# EAGLE board urdevboard (EAGLE 5.06), part 1 of 2
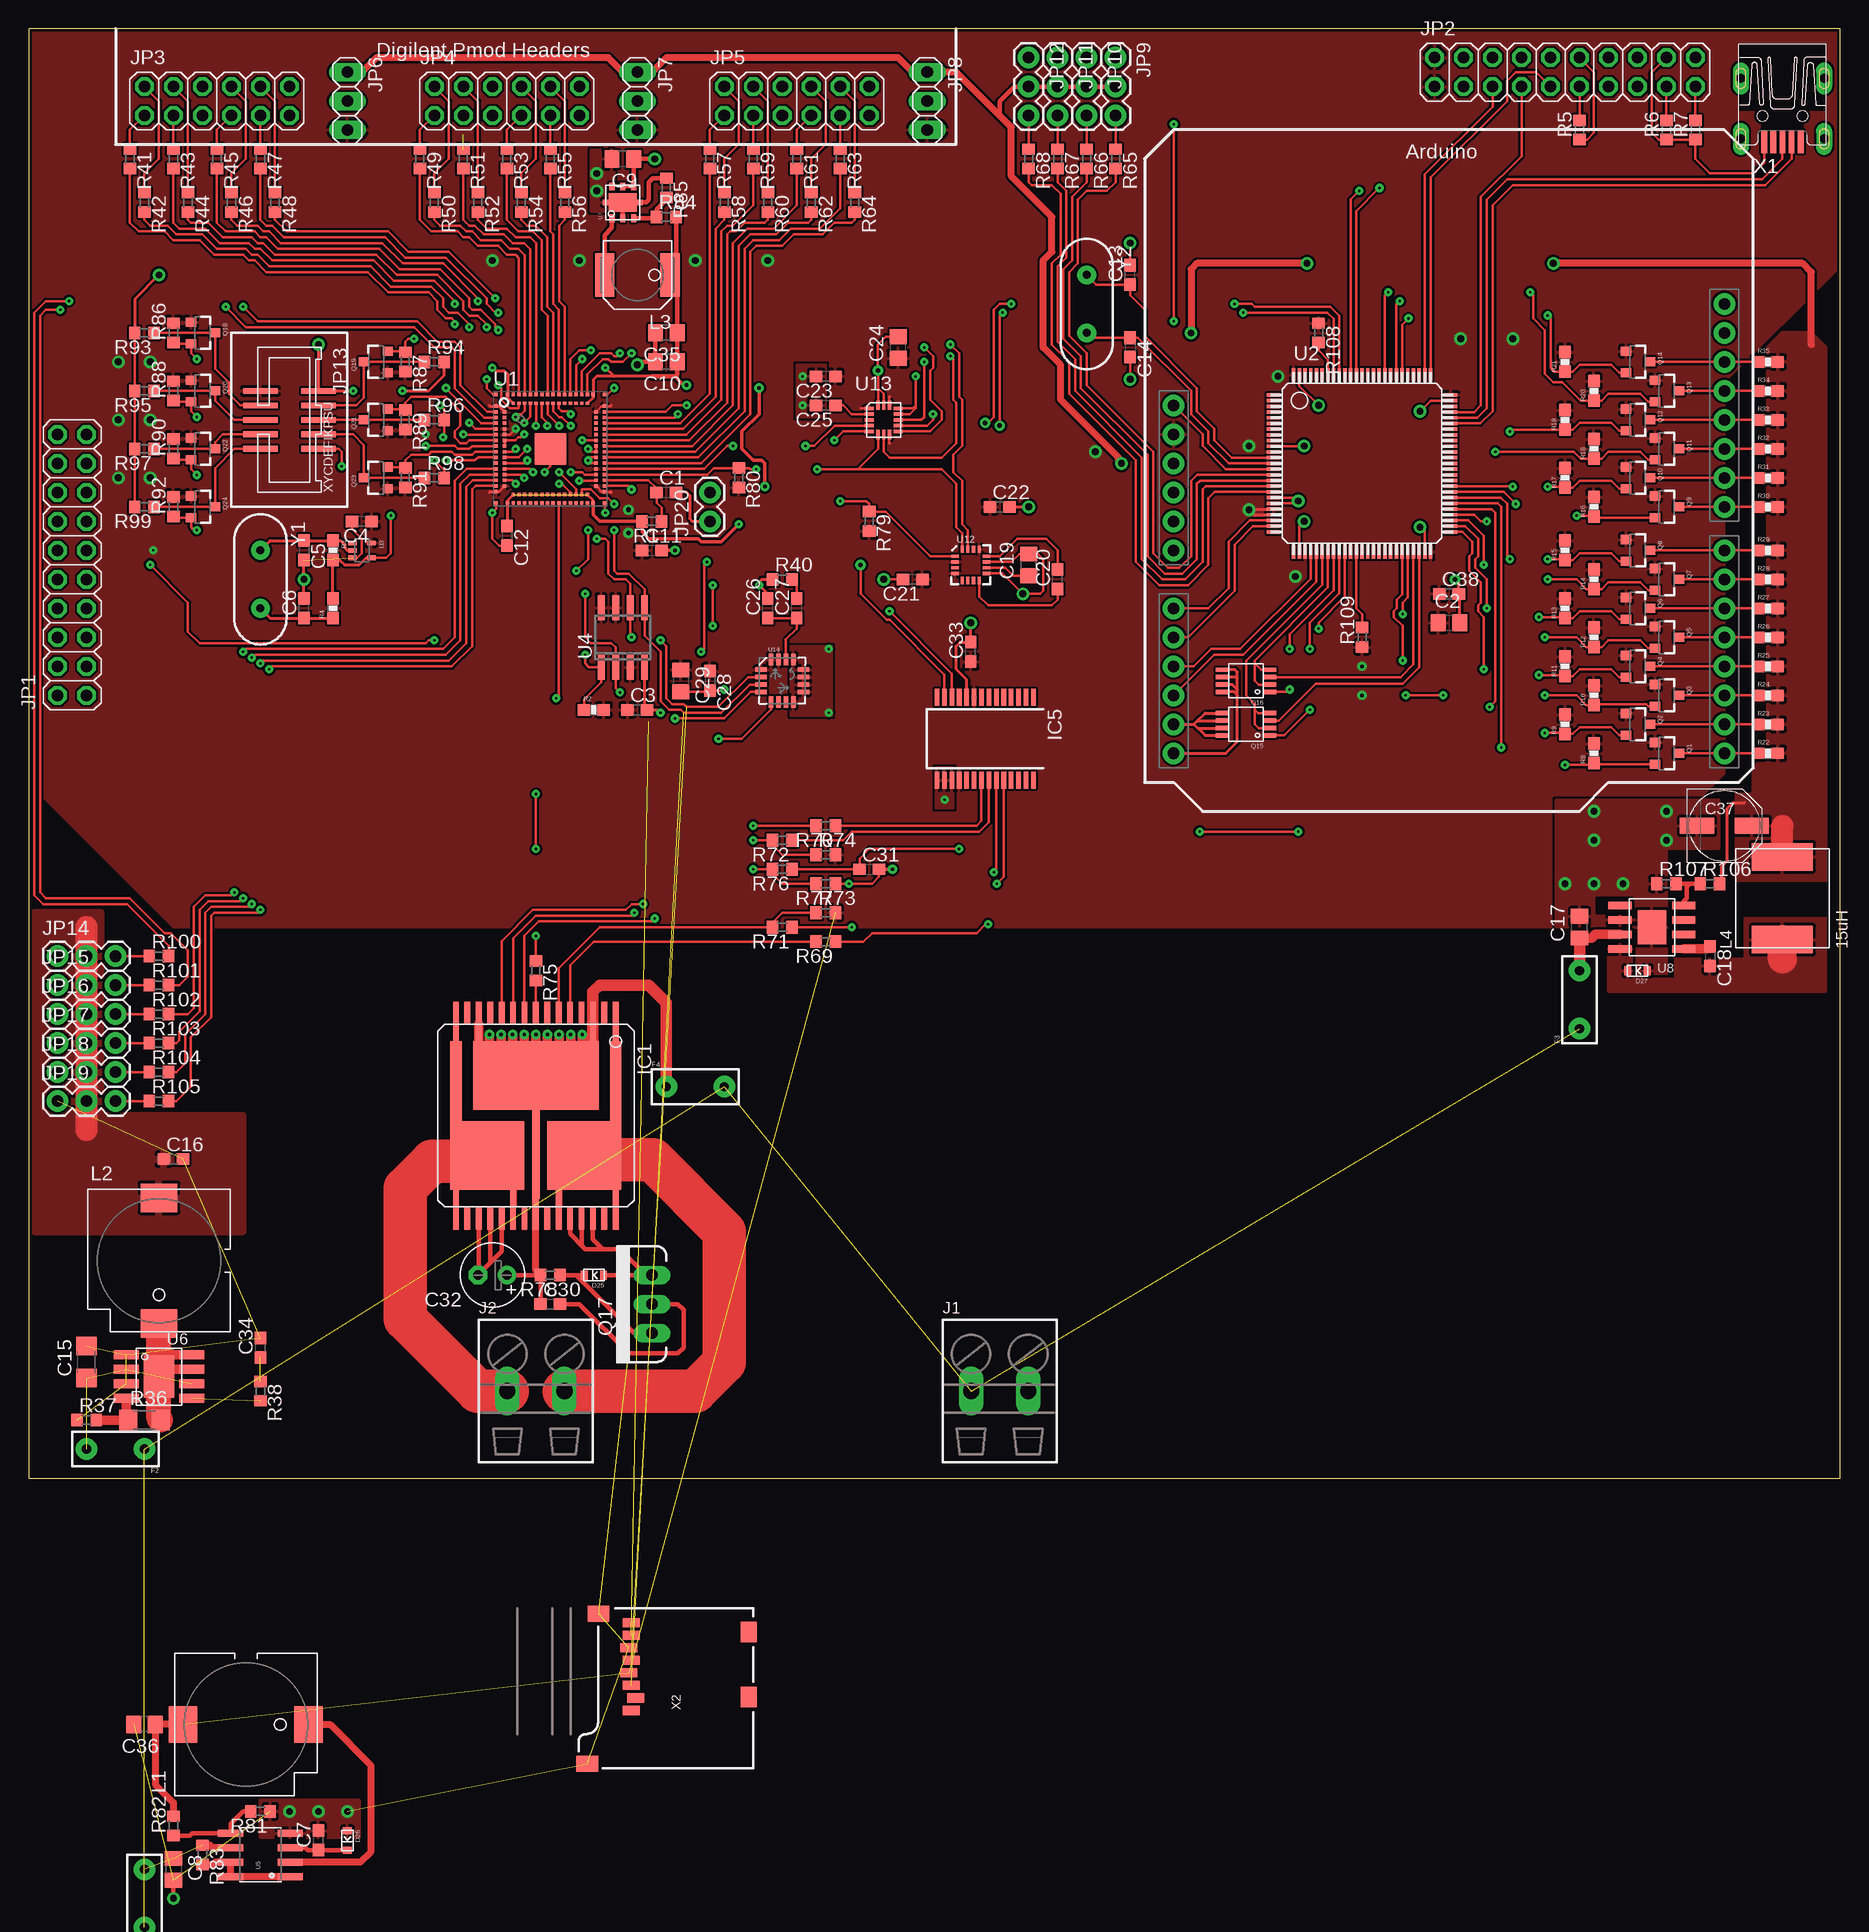
[diagram p0: board, top side]
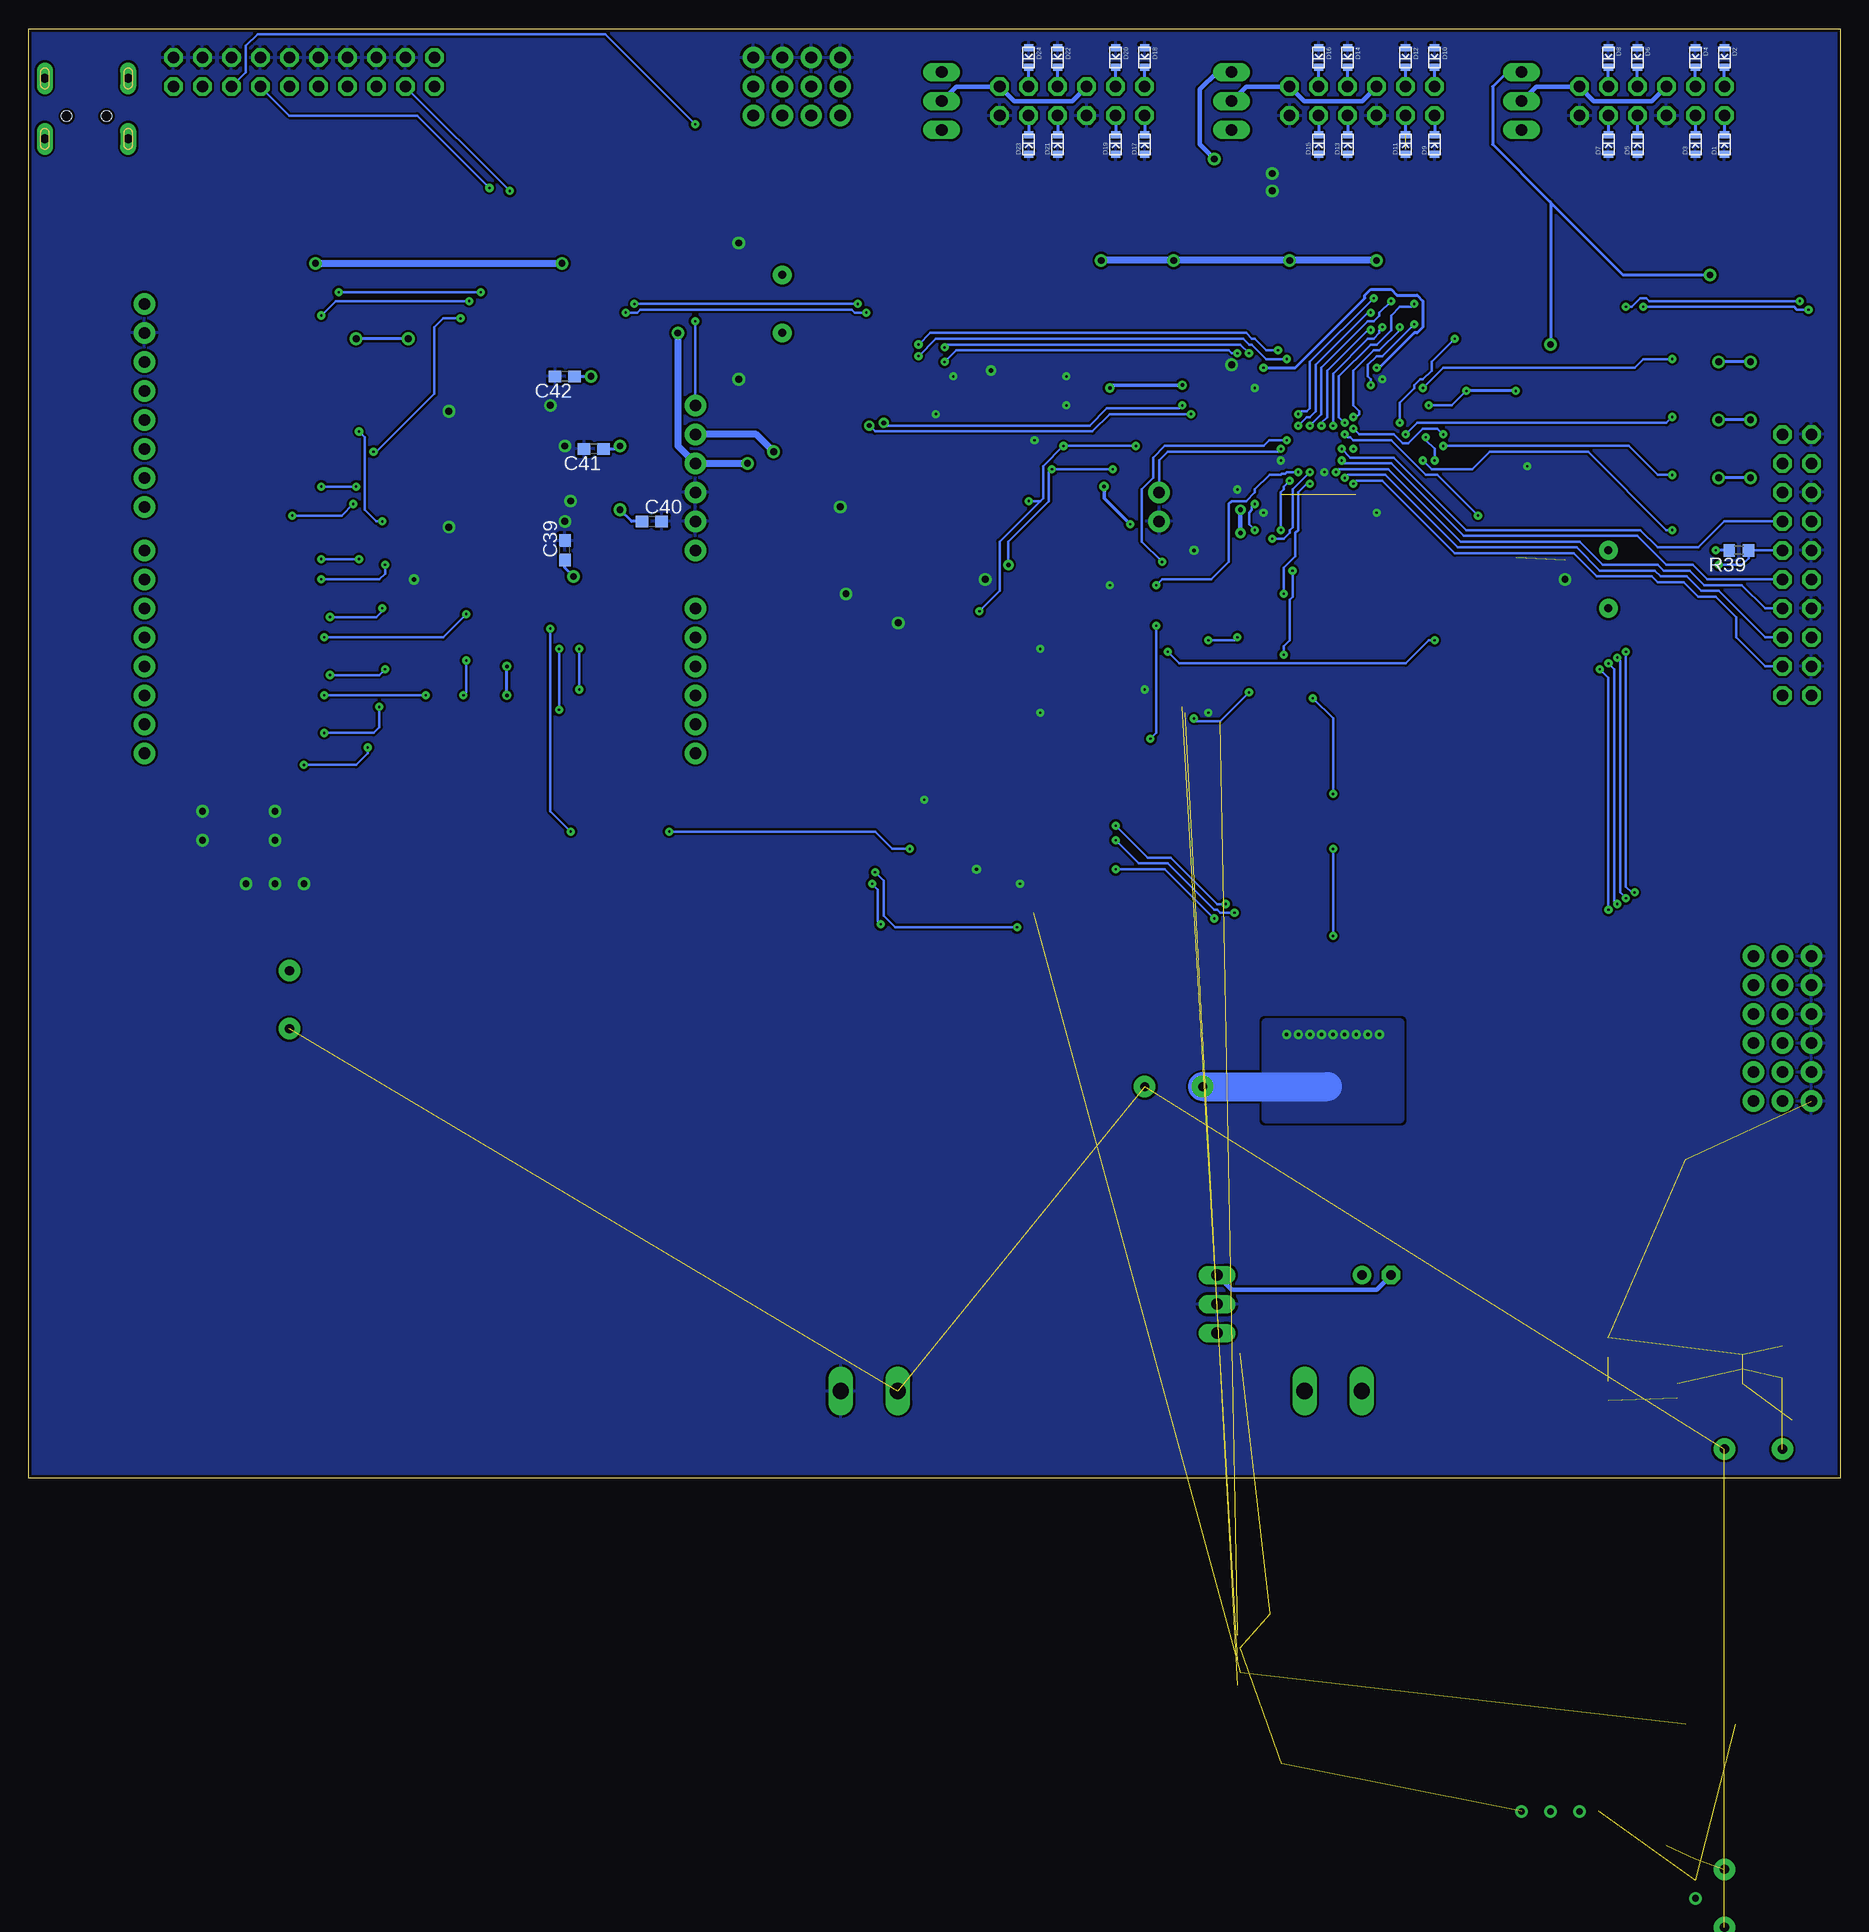
[diagram p1: board, bottom side, seen from below]

Size 158.75 x 127 mm. Coordinates in mm from the lower left corner, seen from the top.
Outline: 0,0 158.73,0 158.75,127 0,127 0,0
Copper layers (1*16): Top 0.035mm / dielectric 1.5mm / Bottom 0.035mm
Design rules "unified *": minimum track width 7mil, minimum drill 6mil, track to track 8mil, track to pad 7mil, pad to pad 7mil, via to via 8mil, smd to smd 7mil, copper to edge 10mil, drill to drill 8mil, minimum pad ring 12mil, minimum via ring 10mil, stop-mask expansion 4mil, vias tented up to drill 25mil, thermal gap 10mil

## Footprints (pad centres in the part's own frame; a part is rotated, then mirrored left to right if it is on the bottom)
C0603 = smd 1.1 x 1: 1 -0.85,0; 2 0.85,0
C0805 = smd 1.3 x 1.5: 1 -0.95,0; 2 0.95,0
C1206 = smd 1.6 x 1.8: 1 -1.4,0; 2 1.4,0
E2,5-6 = drill 0.813 pad 1.6 round: + -1.27,0 | drill 0.813 pad 1.6 octagon: - 1.27,0
PANASONIC_D = smd 3 x 1.4: + 2.4,0; - -2.4,0
D0603 = smd 0.8 x 0.6: A 0,-0.85; C 0,0.85
PTC = drill 0.8 pad 1.88 round: P$1 -2.54,0; P$2 2.54,0
MULTIPOWERSO-30 = smd 0.508 x 12: 1 -7,-4; 15 7,-4; 16 7,4; 30 -7,4 | smd 0.508 x 2: 2 -6,-9; 4 -4,-9; 5 -3,-9; 6 -2,-9; 7 -1,-9; 8 0,-9; 9 1,-9; 10 2,-9; 11 3,-9; 12 4,-9; 14 6,-9; 17 6,9; 18 5,9; 19 4,9; 20 3,9; 22 1,9; 24 -1,9; 26 -3,9; 27 -4,9; 28 -5,9; 29 -6,9 | smd 0.508 x 4: 3 -5,-8; 13 5,-8; 21 2,8; 23 0,8; 25 -2,8 | smd 6.5 x 6: OUTA -4.25,3.5; OUTB 4.25,3.5 | smd 1 x 7.5: OUTA@1 -7,-2.755; OUTB@1 7,-2.755 | smd 11 x 6: VCC 0,-3.5 | smd 0.65 x 8.3: VCC@1 0,3.145
SSOP28 = smd 0.4 x 1.5: 1 -4.225,-3.625; 2 -3.575,-3.625; 3 -2.925,-3.625; 4 -2.275,-3.625; 5 -1.625,-3.625; 6 -0.975,-3.625; 7 -0.325,-3.625; 8 0.325,-3.625; 9 0.975,-3.625; 10 1.625,-3.625; 11 2.275,-3.625; 12 2.925,-3.625; 13 3.575,-3.625; 14 4.225,-3.625; 15 4.225,3.625; 16 3.575,3.625; 17 2.925,3.625; 18 2.275,3.625; 19 1.625,3.625; 20 0.975,3.625; 21 0.325,3.625; 22 -0.325,3.625; 23 -0.975,3.625; 24 -1.625,3.625; 25 -2.275,3.625; 26 -2.925,3.625; 27 -3.575,3.625; 28 -4.225,3.625
796689-2 = drill 1.422 long: 1 -2.5,0; 2 2.5,0
DUEMILANOVE_VIAS = drill 1.016 pad 1.88 round: 3.3V 50.8,13.97; 5V 50.8,16.51; A0 50.8,29.21; A1 50.8,31.75; A2 50.8,34.29; A3 50.8,36.83; A4 50.8,39.37; A5 50.8,41.91; AREF 2.54,2.54; D2 2.54,36.83; D3 2.54,34.29; D4 2.54,31.75; D5 2.54,29.21; D6 2.54,26.67; D7 2.54,24.13; D8 2.54,20.32; D9 2.54,17.78; D10 2.54,15.24; D11 2.54,12.7; D12 2.54,10.16; D13 2.54,7.62; GND@0 50.8,19.05; GND@1 50.8,21.59; GND@2 2.54,5.08; RES 50.8,11.43; RX 2.54,41.91; TX 2.54,39.37; VIN 50.8,24.13
2X10 = drill 1.016 octagon: 1 -11.43,-1.27; 2 -11.43,1.27; 3 -8.89,-1.27; 4 -8.89,1.27; 5 -6.35,-1.27; 6 -6.35,1.27; 7 -3.81,-1.27; 8 -3.81,1.27; 9 -1.27,-1.27; 10 -1.27,1.27; 11 1.27,-1.27; 12 1.27,1.27; 13 3.81,-1.27; 14 3.81,1.27; 15 6.35,-1.27; 16 6.35,1.27; 17 8.89,-1.27; 18 8.89,1.27; 19 11.43,-1.27; 20 11.43,1.27
2X06 = drill 1.016 octagon: 1 -6.35,-1.27; 2 -6.35,1.27; 3 -3.81,-1.27; 4 -3.81,1.27; 5 -1.27,-1.27; 6 -1.27,1.27; 7 1.27,-1.27; 8 1.27,1.27; 9 3.81,-1.27; 10 3.81,1.27; 11 6.35,-1.27; 12 6.35,1.27
1X03 = drill 1.016 long: 1 -2.54,0; 2 0,0; 3 2.54,0
1X03' = drill 1.016 pad 1.88 round: 1 0,0; 2 2.54,0; 3 5.08,0
SHF-105-01-L-D-SM = smd 0.508 x 3.048: 1 -2.54,-2.54; 2 -2.54,2.54; 3 -1.27,-2.54; 4 -1.27,2.54; 5 0,-2.54; 6 0,2.54; 7 1.27,-2.54; 8 1.27,2.54; 9 2.54,-2.54; 10 2.54,2.54
1X02 = drill 1.016 pad 1.88 round: 1 0,0; 2 2.54,0
SLF12565 = smd 3.2 x 2.5: 1 0,-5.5; 2 0,5.5
PANASONIC_ELL6 = smd 1.7 x 3.8: 1 -2.85,0; 2 2.85,0
IHLP-3232DZ = smd 2.413 x 5.334: 1 -3.619,0; 2 3.619,0
SOT23-3 = smd 0.8 x 0.9: 1 -0.95,-1; 2 0.95,-1; 3 0,1.1
MICRO8 = smd 0.38 x 1.04: 1 -0.975,-2.12; 2 -0.325,-2.12; 3 0.325,-2.12; 4 0.975,-2.12; 5 0.975,2.12; 6 0.325,2.12; 7 -0.325,2.12; 8 -0.975,2.12
TO220V = drill 1.016 long: 1 -2.54,0; 2 0,0; 3 2.54,0
R0603 = smd 1 x 1.1: 1 -0.85,0; 2 0.85,0
0603-RES = smd 1.1 x 1: 1 -0.85,0; 2 0.85,0
R1206 = smd 1.6 x 1.803: 1 -1.422,0; 2 1.422,0
124QFN = smd 0.3 x 0.3: A1 -4.75,4.75; A2 -4.75,3.75; A3 -4.75,3.25; A4 -4.75,2.75; A5 -4.75,2.25; A6 -4.75,1.75; A7 -4.75,1.25; A8 -4.75,0.75; A9 -4.75,0.25; A10 -4.75,-0.25; A11 -4.75,-0.75; A12 -4.75,-1.25; A13 -4.75,-1.75; A14 -4.75,-2.25; A15 -4.75,-2.75; A16 -4.75,-3.25; A17 -4.75,-3.75; A18 -4.75,-4.75; A19 -3.75,-4.75; A20 -3.25,-4.75; A21 -2.75,-4.75; A22 -2.25,-4.75; A23 -1.75,-4.75; A24 -1.25,-4.75; A25 -0.75,-4.75; A26 -0.25,-4.75; A27 0.25,-4.75; A28 0.75,-4.75; A29 1.25,-4.75; A30 1.75,-4.75; A31 2.25,-4.75; A32 2.75,-4.75; A33 3.25,-4.75; A34 3.75,-4.75; A35 4.75,-4.75; A36 4.75,-3.75; A37 4.75,-3.25; A38 4.75,-2.75; A39 4.75,-2.25; A40 4.75,-1.75; A41 4.75,-1.25; A42 4.75,-0.75; A43 4.75,-0.25; A44 4.75,0.25; A45 4.75,0.75; A46 4.75,1.25; A47 4.75,1.75; A48 4.75,2.25; A49 4.75,2.75; A50 4.75,3.25; A51 4.75,3.75; A52 4.75,4.75; A53 3.75,4.75; A54 3.25,4.75; A55 2.75,4.75; A56 2.25,4.75; A57 1.75,4.75; A58 1.25,4.75; A59 0.75,4.75; A60 0.25,4.75; A61 -0.25,4.75; A62 -0.75,4.75; A63 -1.25,4.75; A64 -1.75,4.75; A65 -2.25,4.75; A66 -2.75,4.75; A67 -3.25,4.75; A68 -3.75,4.75; B1 -4,3.25; B2 -4,2.75; B3 -4,2.25; B4 -4,1.75; B5 -4,1.25; B6 -4,0.75; B7 -4,0.25; B8 -4,-0.25; B9 -4,-0.75; B10 -4,-1.25; B11 -4,-1.75; B12 -4,-2.25; B13 -4,-2.75; B14 -4,-3.25; B15 -3.25,-4; B16 -2.75,-4; B17 -2.25,-4; B18 -1.75,-4; B19 -1.25,-4; B20 -0.75,-4; B21 -0.25,-4; B22 0.25,-4; B23 0.75,-4; B24 1.25,-4; B25 1.75,-4; B26 2.25,-4; B27 2.75,-4; B28 3.25,-4; B29 4,-3.25; B30 4,-2.75; B31 4,-2.25; B32 4,-1.75; B33 4,-1.25; B34 4,-0.75; B35 4,-0.25; B36 4,0.25; B37 4,0.75; B38 4,1.25; B39 4,1.75; B40 4,2.25; B41 4,2.75; B42 4,3.25; B43 3.25,4; B44 2.75,4; B45 2.25,4; B46 1.75,4; B47 1.25,4; B48 0.75,4; B49 0.25,4; B50 -0.25,4; B51 -0.75,4; B52 -1.25,4; B53 -1.75,4; B54 -2.25,4; B55 -2.75,4; B56 -3.25,4 | smd 2.8 x 2.8: PAD 0,0
LQFP100 = smd 1.2 x 0.3: 1 -7.75,6; 2 -7.75,5.5; 3 -7.75,5; 4 -7.75,4.5; 5 -7.75,4; 6 -7.75,3.5; 7 -7.75,3; 8 -7.75,2.5; 9 -7.75,2; 10 -7.75,1.5; 11 -7.75,1; 12 -7.75,0.5; 13 -7.75,0; 14 -7.75,-0.5; 15 -7.75,-1; 16 -7.75,-1.5; 17 -7.75,-2; 18 -7.75,-2.5; 19 -7.75,-3; 20 -7.75,-3.5; 21 -7.75,-4; 22 -7.75,-4.5; 23 -7.75,-5; 24 -7.75,-5.5; 25 -7.75,-6; 51 7.75,-6; 52 7.75,-5.5; 53 7.75,-5; 54 7.75,-4.5; 55 7.75,-4; 56 7.75,-3.5; 57 7.75,-3; 58 7.75,-2.5; 59 7.75,-2; 60 7.75,-1.5; 61 7.75,-1; 62 7.75,-0.5; 63 7.75,0; 64 7.75,0.5; 65 7.75,1; 66 7.75,1.5; 67 7.75,2; 68 7.75,2.5; 69 7.75,3; 70 7.75,3.5; 71 7.75,4; 72 7.75,4.5; 73 7.75,5; 74 7.75,5.5; 75 7.75,6 | smd 0.3 x 1.2: 26 -6,-7.75; 27 -5.5,-7.75; 28 -5,-7.75; 29 -4.5,-7.75; 30 -4,-7.75; 31 -3.5,-7.75; 32 -3,-7.75; 33 -2.5,-7.75; 34 -2,-7.75; 35 -1.5,-7.75; 36 -1,-7.75; 37 -0.5,-7.75; 38 0,-7.75; 39 0.5,-7.75; 40 1,-7.75; 41 1.5,-7.75; 42 2,-7.75; 43 2.5,-7.75; 44 3,-7.75; 45 3.5,-7.75; 46 4,-7.75; 47 4.5,-7.75; 48 5,-7.75; 49 5.5,-7.75; 50 6,-7.75; 76 6,7.75; 77 5.5,7.75; 78 5,7.75; 79 4.5,7.75; 80 4,7.75; 81 3.5,7.75; 82 3,7.75; 83 2.5,7.75; 84 2,7.75; 85 1.5,7.75; 86 1,7.75; 87 0.5,7.75; 88 0,7.75; 89 -0.5,7.75; 90 -1,7.75; 91 -1.5,7.75; 92 -2,7.75; 93 -2.5,7.75; 94 -3,7.75; 95 -3.5,7.75; 96 -4,7.75; 97 -4.5,7.75; 98 -5,7.75; 99 -5.5,7.75; 100 -6,7.75
SC70 = smd 0.4 x 0.75: 1 -0.65,-0.825; 2 0,-0.825; 3 0.65,-0.825; 4 0.65,0.825; 5 -0.65,0.825
SO-08 = smd 0.6 x 2.2: 1 -1.905,-2.6; 2 -0.635,-2.6; 3 0.635,-2.6; 4 1.905,-2.6; 5 1.905,2.6; 6 0.635,2.6; 7 -0.635,2.6; 8 -1.905,2.6
SO08 = smd 0.61 x 2.21: 1 -1.905,-2.616; 2 -0.635,-2.616; 3 0.635,-2.616; 4 1.905,-2.616; 5 1.905,2.616; 6 0.635,2.616; 7 -0.635,2.616; 8 -1.905,2.616
SO8_EP1 = smd 2.2 x 0.8: 1 -2.87,1.905; 2 -2.87,0.635; 3 -2.87,-0.635; 4 -2.87,-1.905; 5 2.87,-1.905; 6 2.87,-0.635; 7 2.87,0.635; 8 2.87,1.905 | smd 2.71 x 3.7: PAD 0,0
MLP6 = smd 0.7 x 0.45: 1 -1.4,0.95; 2 -1.4,0; 3 -1.4,-0.95; 4 1.4,-0.95; 5 1.4,0; 6 1.4,0.95 | smd 0.45 x 0.525: PADA 0,1.475; PADC 0,-1.475 | smd 1.65 x 2.45: PADB 0,0
R-PDSO-G08 = smd 2.032 x 0.66: 1 -2.794,1.905; 2 -2.794,0.635; 3 -2.794,-0.635; 4 -2.794,-1.905; 5 2.794,-1.905; 6 2.794,-0.635; 7 2.794,0.635; 8 2.794,1.905 | smd 2.489 x 2.997: PAD 0,0
16LPCC = smd 0.65 x 0.28: 1 -1.37,0.75; 2 -1.37,0.25; 3 -1.37,-0.25; 4 -1.37,-0.75; 9 1.37,-0.75; 10 1.37,-0.25; 11 1.37,0.25; 12 1.37,0.75 | smd 0.28 x 0.65: 5 -0.75,-1.37; 6 -0.25,-1.37; 7 0.25,-1.37; 8 0.75,-1.37; 13 0.75,1.37; 14 0.25,1.37; 15 -0.25,1.37; 16 -0.75,1.37
VQFN-16 = smd 0.8 x 0.3: 1 -1.275,1; 2 -1.275,0.5; 3 -1.275,0; 4 -1.275,-0.5; 5 -1.275,-1; 9 1.275,-1; 10 1.275,-0.5; 11 1.275,0; 12 1.275,0.5; 13 1.275,1 | smd 0.3 x 0.8: 6 -0.5,-1.275; 7 0,-1.275; 8 0.5,-1.275; 14 0.5,1.275; 15 0,1.275; 16 -0.5,1.275
LGA16-4X4 = smd 1 x 0.4: 1 -1.85,0.975; 2 -1.85,0.325; 3 -1.85,-0.325; 4 -1.85,-0.975; 9 1.85,-0.975; 10 1.85,-0.325; 11 1.85,0.325; 12 1.85,0.975 | smd 0.4 x 1: 5 -0.975,-1.85; 6 -0.325,-1.85; 7 0.325,-1.85; 8 0.975,-1.85; 13 0.975,1.85; 14 0.325,1.85; 15 -0.325,1.85; 16 -0.975,1.85
UX60-MB-5S8 = smd 2 x 0.5: 1 8.65,1.6; 2 8.65,0.8; 3 8.65,0; 4 8.65,-0.8; 5 8.65,-1.6 | drill 0.8 long: M1 3.1,-3.65; M2 3.1,3.65; M3 8.4,3.65; M4 8.4,-3.65 | hole 0.9: 6.4,-1.75; 6.4,1.75
MICRO-SD-SOCKET-PP = smd 0.8 x 1.5: 1 -8.94,10.7; 2 -7.84,10.3; 3 -6.74,10.7; 4 -5.64,10.9; 5 -4.54,10.7; 6 -3.44,10.9; 7 -2.34,10.7; 8 -1.24,10.7 | smd 1.8 x 1.4: CD1 -2.05,0.4; CD2 -7.75,0.4 | smd 1.4 x 1.9: GND1 -13.6,14.55; GND3 -0.45,13.55
HC49US = drill 0.7 pad 1.651 round: 1 -2.54,0; 2 2.54,0

## Placement (x,y rotation side)
C1  1uF  [C0603]  55.88,86.36 0 top
C2  10uF  [C0805]  124.46,74.93 0 top
C3  0.1uF  [C0603]  53.34,67.31 0 top
C4  0.1uF  [C0603]  29.21,83.82 180 top
C5  18pF  [C0603]  24.13,81.28 270 top
C6  18pF  [C0603]  24.13,76.2 90 top
C7  290pF  [C0603]  25.4,-31.75 90 top  (outside the outline)
C8  100uF  [C0805]  12.7,-34.29 270 top  (outside the outline)
C9  10uF  [C0805]  52.07,115.57 180 top
C10  10uF  [C0805]  55.88,97.79 180 top
C11  0.1uF  [C0603]  54.61,81.28 0 top
C12  0.1uF  [C0603]  41.91,82.55 270 top
C13  10pF  [C0603]  96.52,105.41 90 top
C14  10pF  [C0603]  96.52,99.06 270 top
C15  [C1206]  5.08,10.16 90 top
C16  [C0603]  12.7,27.94 0 top
C17  10uF  [C0805]  135.89,48.26 90 top
C18  0.01uF  [C0603]  147.32,45.72 270 top
C19  4.7uF  [C0805]  87.63,80.01 90 top
C20  0.22uF  [C0603]  90.17,78.74 90 top
C21  0.1uF  [C0603]  77.47,78.74 180 top
C22  0.1uF  [C0603]  85.09,85.09 0 top
C23  0.1uF  [C0603]  69.85,96.52 180 top
C24  4.7uF  [C0805]  76.2,99.06 90 top
C25  0.1uF  [C0603]  69.85,93.98 180 top
C26  10nF  [C0603]  64.77,76.2 90 top
C27  470nF  [C0603]  67.31,76.2 90 top
C28  0.1uF  [C0603]  59.69,69.85 270 top
C29  10uF  [C0805]  57.15,69.85 270 top
C30  0.1uF  [C0603]  45.72,15.24 0 top
C31  33nF  [C0603]  73.66,53.34 0 top
C32  500uF  [E2,5-6]  40.64,17.78 180 top
C33  0.1uF  [C0603]  82.55,72.39 90 top
C34  [C0603]  20.32,11.43 90 top
C35  10uF  [C0805]  55.88,100.33 180 top
C36  152uF  [C0805]  10.16,-21.59 180 top  (outside the outline)
C37  220uF  [PANASONIC_D]  148.59,57.15 0 top
C38  0.1uF  [C0603]  124.46,77.47 0 top
C39  0.1uF  [C0603]  111.76,81.28 90 bottom
C40  0.1uF  [C0603]  104.14,83.82 0 bottom
C41  0.1uF  [C0603]  109.22,90.17 180 bottom
C42  0.1uF  [C0603]  111.76,96.52 180 bottom
D1  [D0603]  10.16,116.84 0 bottom
D2  [D0603]  10.16,124.46 180 bottom
D3  [D0603]  12.7,116.84 0 bottom
D4  [D0603]  12.7,124.46 180 bottom
D5  [D0603]  17.78,116.84 0 bottom
D6  [D0603]  17.78,124.46 180 bottom
D7  [D0603]  20.32,116.84 0 bottom
D8  [D0603]  20.32,124.46 180 bottom
D9  [D0603]  35.56,116.84 0 bottom
D10  [D0603]  35.56,124.46 180 bottom
D11  [D0603]  38.1,116.84 0 bottom
D12  [D0603]  38.1,124.46 180 bottom
D13  [D0603]  43.18,116.84 0 bottom
D14  [D0603]  43.18,124.46 180 bottom
D15  [D0603]  45.72,116.84 0 bottom
D16  [D0603]  45.72,124.46 180 bottom
D17  [D0603]  60.96,116.84 0 bottom
D18  [D0603]  60.96,124.46 180 bottom
D19  [D0603]  63.5,116.84 0 bottom
D20  [D0603]  63.5,124.46 180 bottom
D21  [D0603]  68.58,116.84 0 bottom
D22  [D0603]  68.58,124.46 180 bottom
D23  [D0603]  71.12,116.84 0 bottom
D24  [D0603]  71.12,124.46 180 bottom
D25  CD-S  [D0603]  49.53,17.78 90 top
D26  CDBU0130R  [D0603]  27.94,-31.75 180 top  (outside the outline)
D27  CDBU0130R  [D0603]  140.97,44.45 90 top
F1  PTCPTH  [PTC]  10.16,-36.83 90 top  (outside the outline)
F2  5A?  [PTC]  7.62,2.54 180 top
F3  3A  [PTC]  135.89,41.91 90 top
F4  PTCPTH  [PTC]  58.42,34.29 0 top
IC1  VNH2SP30  [MULTIPOWERSO-30]  44.45,31.75 180 top
IC5  MCP23017SS  [SSOP28]  83.82,64.77 180 top
J1  796689-2  [796689-2]  85.09,7.62 0 top
J2  796689-2  [796689-2]  44.45,7.62 0 top
JARD  ARDUINO_SHIELDNO_SILK  [DUEMILANOVE_VIAS]  151.13,105.41 180 top
JP1  [2X10]  3.81,80.01 90 top
JP2  [2X10]  134.62,123.19 0 top
JP3  [2X06]  16.51,120.65 0 top
JP4  [2X06]  41.91,120.65 0 top
JP5  [2X06]  67.31,120.65 0 top
JP6  [1X03]  27.94,120.65 270 top
JP7  [1X03]  53.34,120.65 270 top
JP8  [1X03]  78.74,120.65 270 top
JP9  [1X03']  95.25,124.46 270 top
JP10  [1X03']  92.71,124.46 270 top
JP11  [1X03']  90.17,124.46 270 top
JP12  [1X03']  87.63,124.46 270 top
JP13  SHF-105-01-L-D-SM  [SHF-105-01-L-D-SM]  22.86,92.71 270 top
JP14  [1X03']  2.54,45.72 0 top
JP15  [1X03']  2.54,43.18 0 top
JP16  [1X03']  2.54,40.64 0 top
JP17  [1X03']  2.54,38.1 0 top
JP18  [1X03']  2.54,35.56 0 top
JP19  [1X03']  2.54,33.02 0 top
JP20  [1X02]  59.69,83.82 90 top
L1  68uH  [SLF12565]  19.05,-21.59 90 top  (outside the outline)
L2  [SLF12565]  11.43,19.05 0 top
L3  3.3uH  [PANASONIC_ELL6]  53.34,105.41 180 top
L4  15uH  [IHLP-3232DZ]  153.67,50.8 90 top
Q1  DMG1012UW  [SOT23-3]  143.51,63.5 270 top
Q2  DMG1012UW  [SOT23-3]  140.97,66.04 270 top
Q3  DMG1012UW  [SOT23-3]  143.51,68.58 270 top
Q4  DMG1012UW  [SOT23-3]  140.97,71.12 270 top
Q5  DMG1012UW  [SOT23-3]  143.51,73.66 270 top
Q6  DMG1012UW  [SOT23-3]  140.97,76.2 270 top
Q7  DMG1012UW  [SOT23-3]  143.51,78.74 270 top
Q8  DMG1012UW  [SOT23-3]  140.97,81.28 270 top
Q9  DMG1012UW  [SOT23-3]  143.51,85.09 270 top
Q10  DMG1012UW  [SOT23-3]  140.97,87.63 270 top
Q11  DMG1012UW  [SOT23-3]  143.51,90.17 270 top
Q12  DMG1012UW  [SOT23-3]  140.97,92.71 270 top
Q13  DMG1012UW  [SOT23-3]  143.51,95.25 270 top
Q14  DMG1012UW  [SOT23-3]  140.97,97.79 270 top
Q15  IRF7509  [MICRO8]  106.68,66.04 90 top
Q16  IRF7509  [MICRO8]  106.68,69.85 90 top
Q17  NCH  [TO220V]  54.61,15.24 90 top
Q18  DMG1012UW  [SOT23-3]  15.24,100.33 270 top
Q19  DMG1012UW  [SOT23-3]  30.48,97.79 90 top
Q20  DMG1012UW  [SOT23-3]  15.24,95.25 270 top
Q21  DMG1012UW  [SOT23-3]  30.48,92.71 90 top
Q22  DMG1012UW  [SOT23-3]  15.24,90.17 270 top
Q23  DMG1012UW  [SOT23-3]  30.48,87.63 90 top
Q24  DMG1012UW  [SOT23-3]  15.24,85.09 270 top
R1  2R2  [R0603]  54.61,83.82 180 top
R2  10K  [0603-RES]  49.53,67.31 0 top
R3  2.2M  [0603-RES]  26.67,81.28 270 top
R4  470  [0603-RES]  26.67,76.2 90 top
R5  10K  [R0603]  135.89,118.11 90 top
R6  10K  [R0603]  143.51,118.11 90 top
R7  10K  [R0603]  146.05,118.11 90 top
R8  10K  [0603-RES]  137.16,63.5 90 top
R9  10K  [0603-RES]  134.62,66.04 90 top
R10  10K  [0603-RES]  137.16,68.58 90 top
R11  10K  [0603-RES]  134.62,71.12 90 top
R12  10K  [0603-RES]  137.16,73.66 90 top
R13  10K  [0603-RES]  134.62,76.2 90 top
R14  10K  [0603-RES]  137.16,78.74 90 top
R15  10K  [0603-RES]  134.62,81.28 90 top
R16  10K  [0603-RES]  137.16,85.09 90 top
R17  10K  [0603-RES]  134.62,87.63 90 top
R18  10K  [0603-RES]  137.16,90.17 90 top
R19  10K  [0603-RES]  134.62,92.71 90 top
R20  10K  [0603-RES]  137.16,95.25 90 top
R21  10K  [0603-RES]  134.62,97.79 90 top
R22  10K  [0603-RES]  152.4,63.5 0 top
R23  10K  [0603-RES]  152.4,66.04 0 top
R24  10K  [0603-RES]  152.4,68.58 0 top
R25  10K  [0603-RES]  152.4,71.12 0 top
R26  10K  [0603-RES]  152.4,73.66 0 top
R27  10K  [0603-RES]  152.4,76.2 0 top
R28  10K  [0603-RES]  152.4,78.74 0 top
R29  10K  [0603-RES]  152.4,81.28 0 top
R30  10K  [0603-RES]  152.4,85.09 0 top
R31  10K  [0603-RES]  152.4,87.63 0 top
R32  10K  [0603-RES]  152.4,90.17 0 top
R33  10K  [0603-RES]  152.4,92.71 0 top
R34  10K  [0603-RES]  152.4,95.25 0 top
R35  10K  [0603-RES]  152.4,97.79 0 top
R36  [R1206]  10.16,5.08 0 top
R37  [R0603]  5.08,5.08 0 top
R38  [R0603]  20.32,7.62 270 top
R39  4.7K  [R0603]  8.89,81.28 180 bottom
R40  10K  [R0603]  66.04,78.74 0 top
R41  200  [R0603]  8.89,115.57 270 top
R42  200  [R0603]  10.16,111.76 270 top
R43  200  [R0603]  12.7,115.57 270 top
R44  200  [R0603]  13.97,111.76 270 top
R45  200  [R0603]  16.51,115.57 270 top
R46  200  [R0603]  17.78,111.76 270 top
R47  200  [R0603]  20.32,115.57 270 top
R48  200  [R0603]  21.59,111.76 270 top
R49  200  [R0603]  34.29,115.57 270 top
R50  200  [R0603]  35.56,111.76 270 top
R51  200  [R0603]  38.1,115.57 270 top
R52  200  [R0603]  39.37,111.76 270 top
R53  200  [R0603]  41.91,115.57 270 top
R54  200  [R0603]  43.18,111.76 270 top
R55  200  [R0603]  45.72,115.57 270 top
R56  200  [R0603]  46.99,111.76 270 top
R57  200  [R0603]  59.69,115.57 270 top
R58  200  [R0603]  60.96,111.76 270 top
R59  200  [R0603]  63.5,115.57 270 top
R60  200  [R0603]  64.77,111.76 270 top
R61  200  [R0603]  67.31,115.57 270 top
R62  200  [R0603]  68.58,111.76 270 top
R63  200  [R0603]  71.12,115.57 270 top
R64  200  [R0603]  72.39,111.76 270 top
R65  100  [R0603]  95.25,115.57 270 top
R66  100  [R0603]  92.71,115.57 270 top
R67  100  [R0603]  90.17,115.57 270 top
R68  100  [R0603]  87.63,115.57 270 top
R69  1K  [R0603]  69.85,46.99 180 top
R70  1K  [R0603]  69.85,57.15 180 top
R71  1K  [R0603]  66.04,48.26 180 top
R72  1K  [R0603]  66.04,55.88 180 top
R73  3.3K  [R0603]  69.85,49.53 0 top
R74  3.3K  [R0603]  69.85,54.61 0 top
R75  1K  [R0603]  44.45,44.45 270 top
R76  10K  [R0603]  66.04,53.34 180 top
R77  1.5K  [R0603]  69.85,52.07 180 top
R78  100K  [R0603]  45.72,17.78 180 top
R79  1.1K  [R0603]  73.66,83.82 270 top
R80  1.1K  [R0603]  62.23,87.63 270 top
R81  11K  [R0603]  20.32,-29.21 180 top  (outside the outline)
R82  18K  [R0603]  12.7,-30.48 90 top  (outside the outline)
R83  0.3  [R0603]  15.24,-33.02 270 top  (outside the outline)
R84  1.8K  [R0603]  55.88,110.49 0 top
R85  6.8K  [R0603]  55.88,113.03 270 top
R86  10K  [R0603]  12.7,100.33 90 top
R87  10K  [R0603]  33.02,97.79 270 top
R88  10K  [R0603]  12.7,95.25 90 top
R89  10K  [R0603]  33.02,92.71 270 top
R90  10K  [R0603]  12.7,90.17 90 top
R91  10K  [R0603]  33.02,87.63 270 top
R92  10K  [R0603]  12.7,85.09 90 top
R93  10K  [R0603]  10.16,100.33 180 top
R94  10K  [R0603]  35.56,97.79 0 top
R95  10K  [R0603]  10.16,95.25 180 top
R96  10K  [R0603]  35.56,92.71 0 top
R97  10K  [R0603]  10.16,90.17 180 top
R98  10K  [R0603]  35.56,87.63 0 top
R99  10K  [R0603]  10.16,85.09 180 top
R100  100  [R0603]  11.43,45.72 0 top
R101  100  [R0603]  11.43,43.18 0 top
R102  100  [R0603]  11.43,40.64 0 top
R103  100  [R0603]  11.43,38.1 0 top
R104  100  [R0603]  11.43,35.56 0 top
R105  100  [R0603]  11.43,33.02 0 top
R106  10K  [R0603]  147.32,52.07 0 top
R107  3.24K  [R0603]  143.51,52.07 0 top
R108  10K  [R0603]  113.03,100.33 270 top
R109  10K  [R0603]  116.84,73.66 90 top
U1  XS1-L2-SPLIT  [124QFN]  45.72,90.17 0 top
U2  STM32L15XVX  [LQFP100]  116.84,88.9 0 top
U3  NC7SZU04  [SC70]  29.21,81.28 270 top
U4  SST25VF010A  [SO-08]  52.07,73.66 0 top
U5  MC34063SMD  [SO08]  20.32,-33.02 90 top  (outside the outline)
U6  AOZ1036PI  [SO8_EP1]  11.43,8.89 0 top
U7  FAN2012  [MLP6]  52.07,111.76 90 top
U8  TPS5431  [R-PDSO-G08]  142.24,48.26 180 top
U12  HMC5883LSMD  [16LPCC]  82.55,80.01 0 top
U13  MMA845XQ  [VQFN-16]  74.93,92.71 0 top
U14  L3G4200D  [LGA16-4X4]  66.04,69.85 0 top
X1  MINI-USB-UX60-MB-5S8  [UX60-MB-5S8]  153.67,125.73 270 top
X2  USD-SOCKETNEW  [MICRO-SD-SOCKET-PP]  63.5,-11.43 90 top  (outside the outline)
Y1  20M  [HC49US]  20.32,78.74 270 top
Y2  [HC49US]  92.71,102.87 270 top

## Library data of the parts
C1-C42 L1-L4 R1 R5-R7 R36-R109 = rcl
D1-D27 = diode
F1-F4 JARD JP9-JP12 JP14-JP20 Q1-Q14 Q17-Q24 R2-R4 R8-R35 U3 U5 U12 U14 X2 Y1 Y2 = SparkFun
IC1 U2 = st-microelectronics
IC5 U4 = microchip
J1 J2 = con-tyco
JP1-JP8 = pinhead
JP13 = con-samtec
Q15 Q16 = auv
U1 = XMOS
U6 = aos
U7 = fairchild-semic
U8 = texas
U13 = freescale
X1 = con-hirose

## Nets
1.0V: C10.1 C12.1 C35.1 L3.1 R1.2 R84.2 U1.A19 U1.A34 U1.A53 U1.A68 U1.B15 U1.B28 U1.B43 U1.B56
+3V3: C2.1 C3.1 C4.1 C11.1 C21.1 C22.1 C23.1 C24.1 C28.1 C29.1 C33.1 C36.1 C38.1 C39.1 C40.1 C41.1 C42.1 IC5.9 IC5.18 JARD.3.3V JP2.1 JP2.2 JP6.3 JP7.3 JP8.3 JP13.1 L1.2 Q1.1 Q2.1 Q3.1 Q4.1 Q5.1 Q6.1 Q7.1 Q8.1 Q9.1 Q10.1 Q11.1 Q12.1 Q13.1 Q14.1 Q18.1 Q19.1 Q20.1 Q21.1 Q22.1 Q23.1 Q24.1 R2.2 R8.2 R9.2 R10.2 R11.2 R12.2 R13.2 R14.2 R15.2 R16.2 R17.2 R18.2 R19.2 R20.2 R21.2 R39.2 R73.2 R74.2 R79.2 R80.2 R82.2 R86.2 R87.2 R88.2 R89.2 R90.2 R91.2 R92.2 R108.1 R109.1 U1.A2 U1.A17 U1.A36 U1.A51 U1.B1 U1.B4 U1.B5 U1.B14 U1.B29 U1.B32 U1.B42 U2.11 U2.21 U2.22 U2.28 U2.50 U2.75 U2.100 U3.5 U4.3 U4.7 U4.8 U12.2 U12.4 U12.13 U13.1 U13.8 U13.14 U14.1 U14.15 U14.16 X2.4
+5V: C9.1 C37.+ JARD.5V JP6.1 JP7.1 JP8.1 JP9.2 JP10.2 JP11.2 JP12.2 JP13.2 L4.2 R22.2 R23.2 R24.2 R25.2 R26.2 R27.2 R28.2 R29.2 R30.2 R31.2 R32.2 R33.2 R34.2 R35.2 R93.2 R94.2 R95.2 R96.2 R97.2 R98.2 R99.2 R106.2 U7.4 U7.5
+12V: F1.P$1 F2.P$1 F3.P$1 F4.P$2 J1.1
ADCIN_0: JARD.A0 U2.23
ADCIN_1: JARD.A1 U2.24
ADCIN_2: U2.25
ADCIN_3: U2.26
ADCIN_4: JARD.A2 U2.29
ADCIN_5: JARD.A3 U2.30
ADCIN_8: C31.1 R76.1 U2.35
ADCIN_9: U2.36
ADCIN_10: R65.2 U2.15
ADCIN_11: R66.2 U2.16
ADCIN_12: R67.2 U2.17
ADCIN_13: R68.2 U2.18
ADCIN_14: Q16.1 U2.33
ADCIN_15: Q15.1 U2.34
ADCIN_22: U2.38
ADCIN_23: U2.39
ADCIN_24: U2.40
ADCIN_25: U2.41
ARDUINO_A4: JARD.A4 Q15.5 Q15.6 Q15.7 Q15.8
ARDUINO_A5: JARD.A5 Q16.5 Q16.6 Q16.7 Q16.8
ARDUINO_D2: JARD.D2 Q3.3 R24.1
ARDUINO_D3: JARD.D3 Q4.3 R25.1
ARDUINO_D4: JARD.D4 Q5.3 R26.1
ARDUINO_D5: JARD.D5 Q6.3 R27.1
ARDUINO_D6: JARD.D6 Q7.3 R28.1
ARDUINO_D7: JARD.D7 Q8.3 R29.1
ARDUINO_D8: JARD.D8 Q9.3 R30.1
ARDUINO_D9: JARD.D9 Q10.3 R31.1
ARDUINO_D10: JARD.D10 Q11.3 R32.1
ARDUINO_D11: JARD.D11 Q12.3 R33.1
ARDUINO_D12: JARD.D12 Q13.3 R34.1
ARDUINO_D13: JARD.D13 Q14.3 R35.1
ARDUINO_RX: JARD.RX Q1.3 R22.1
ARDUINO_TX: JARD.TX Q2.3 R23.1
BOOT0: R108.2 U2.94
BOOT1: R109.2 U2.37
BOOT_SEL: JP20.2 U1.B35 U1.B36
C27_R40: C27.2 R40.2
CLK1: R3.2 R4.2 U1.B6 U1.B7 U3.4
DBGACK: JP2.19 R7.2
DBGRQ: JP2.17 R6.2
DEBUG_N: JP1.11 R39.1 U1.B37
EEPROM_SS: R2.1 U1.B30 U4.1
EXTERNAL_ADC_0: JP9.3 R65.1
EXTERNAL_ADC_1: JP10.3 R66.1
EXTERNAL_ADC_2: JP11.3 R67.1
EXTERNAL_ADC_3: JP12.3 R68.1
F3_OUT: C17.1 F3.P$2 U8.7
GND: C1.2 C2.2 C3.2 C4.2 C5.2 C6.2 C7.2 C8.2 C9.2 C10.2 C11.2 C12.2 C13.2 C14.2 C15.2 C16.2 C17.2 C19.2 C21.2 C22.2 C23.2 C24.2 C25.2 C26.2 C28.2 C29.2 C30.2 C31.2 C33.2 C34.2 C35.2 C36.2 C37.- C38.2 C39.2 C40.2 C41.2 C42.2 D1.A D2.A D3.A D4.A D5.A D6.A D7.A D8.A D9.A D10.A D11.A D12.A D13.A D14.A D15.A D16.A D17.A D18.A D19.A D20.A D21.A D22.A D23.A D24.A D26.A D27.A IC5.10 IC5.15 IC5.16 IC5.17 J1.2 JARD.GND@0 JARD.GND@1 JARD.GND@2 JP1.4 JP1.8 JP1.12 JP1.16 JP1.20 JP2.4 JP2.6 JP2.8 JP2.10 JP2.12 JP2.14 JP2.16 JP2.18 JP2.20 JP3.5 JP3.11 JP4.5 JP4.11 JP5.5 JP5.11 JP9.1 JP10.1 JP11.1 JP12.1 JP13.10 JP14.1 JP15.1 JP16.1 JP17.1 JP18.1 JP19.1 JP20.1 Q17.2 R5.1 R6.1 R7.1 R37.1 R40.1 R77.1 R81.1 R85.1 R107.1 U1.A1 U1.A18 U1.A35 U1.A37 U1.A52 U1.B33 U1.B34 U1.PAD U2.10 U2.19 U2.20 U2.27 U2.49 U2.74 U2.99 U3.3 U4.4 U5.4 U6.1 U6.3 U7.2 U7.PADA U7.PADB U7.PADC U8.6 U8.PAD U12.9 U12.11 U13.5 U13.10 U13.12 U13.13 U13.15 U13.16 U14.8 U14.9 U14.10 U14.11 U14.12 U14.13 X1.5 X2.6 X2.GND1 X2.GND3
IC1_CS: IC1.9 R76.2 R77.2
IC1_DIAGA: IC1.6 R71.2 R73.1
IC1_DIAGB: IC1.10 R72.2 R74.1
IC1_GND: C32.- D25.A IC1.18 IC1.19 IC1.20 IC1.26 IC1.27 IC1.28 Q17.3
IC1_INA: IC1.5 R69.2
IC1_INB: IC1.11 R70.2
IC1_OUTA: IC1.1 IC1.25 IC1.30 IC1.OUTA IC1.OUTA@1 J2.2
IC1_OUTB: IC1.15 IC1.16 IC1.21 IC1.OUTB IC1.OUTB@1 J2.1
IC1_PWM: IC1.8 R75.2
IC1_VCC: C30.1 C32.+ F4.P$1 IC1.3 IC1.13 IC1.23 IC1.VCC IC1.VCC@1 R78.2
IC5_A0: IC5.21 R70.1
IC5_A1: IC5.22 R72.1
IC5_A2: IC5.23 R71.1
IC5_A3: IC5.24 R69.1
IC5_A4: IC5.25
IC5_A5: IC5.26
IC5_A6: IC5.27
IC5_A7: IC5.28
IC5_B0: IC5.1
IC5_B1: IC5.2
IC5_B2: IC5.3
IC5_B3: IC5.4
IC5_B4: IC5.5
IC5_B5: IC5.6
IC5_B6: IC5.7
IC5_B7: IC5.8
JP3_1: D1.C JP3.1 R41.1
JP3_2: D2.C JP3.2 R42.1
JP3_3: D3.C JP3.3 R43.1
JP3_4: D4.C JP3.4 R44.1
JP3_7: D5.C JP3.7 R45.1
JP3_8: D6.C JP3.8 R46.1
JP3_9: D7.C JP3.9 R47.1
JP3_10: D8.C JP3.10 R48.1
JP3_VCC: JP3.6 JP3.12 JP6.2
JP4_1: D9.C JP4.1 R49.1
JP4_2: D10.C JP4.2 R50.1
JP4_3: D11.C JP4.3 R51.1
JP4_4: D12.C JP4.4 R52.1
JP4_7: D13.C JP4.7 R53.1
JP4_8: D14.C JP4.8 R54.1
JP4_9: D15.C JP4.9 R55.1
JP4_10: D16.C JP4.10 R56.1
JP4_VCC: JP4.6 JP4.12 JP7.2
JP5_1: D17.C JP5.1 R57.1
JP5_2: D18.C JP5.2 R58.1
JP5_3: D19.C JP5.3 R59.1
JP5_4: D20.C JP5.4 R60.1
JP5_7: D21.C JP5.7 R61.1
JP5_8: D22.C JP5.8 R62.1
JP5_9: D23.C JP5.9 R63.1
JP5_10: D24.C JP5.10 R64.1
JP5_VCC: JP5.6 JP5.12 JP8.2
JP13_3: JP13.3 Q18.3 R93.1
JP13_4: JP13.4 Q19.3 R94.1
JP13_5: JP13.5 Q20.3 R95.1
JP13_6: JP13.6 Q21.3 R96.1
JP13_7: JP13.7 Q22.3 R97.1
JP13_8: JP13.8 Q23.3 R98.1
JP13_9: JP13.9 Q24.3 R99.1
JTCK: JP2.9 U2.76
JTDI: JP2.5 U2.77
JTDO: JP2.13 U2.89
JTMS: JP2.7 U2.72
JTRST: JP2.3 U2.90
NRSTIN: JARD.RES JP2.15 U2.14
PWM_0: R75.1 U1.A28
PWM_1: U1.A20
PWM_2: U1.A22
Q17G: D25.C Q17.1 R78.1
RST_N: JP1.15
RTCK: JP2.11 R5.2
SCL: IC5.12 R79.1 U1.A40 U12.1 U13.4
SDA: IC5.13 R80.1 U1.A39 U12.16 U13.6
SERVO_0: JP14.3 R100.1
SERVO_1: JP15.3 R101.1
SERVO_2: JP16.3 R102.1
SERVO_3: JP17.3 R103.1
SERVO_4: JP18.3 R104.1
SERVO_5: JP19.3 R105.1
SPI_MISO: U1.B25 U4.2 U14.4 X2.7
SPI_MOSI: U1.B27 U4.5 U14.3 X2.3
SPI_SCK: U1.B26 U4.6 U14.2 X2.5
STM32_I2C1_SCL: U2.96
STM32_I2C1_SDA: U2.95
STM32_I2C2_SCL: Q16.3 U2.47
STM32_I2C2_SDA: Q15.3 U2.48
STM32_OSC_IN: C13.1 U2.12 Y2.1
STM32_OSC_OUT: C14.1 U2.13 Y2.2
STM32_PA6: Q15.2 Q15.4 U2.31
STM32_PA7: Q16.2 Q16.4 U2.32
STM32_PA8: U2.67
STM32_PB12: Q4.2 R11.1 U2.51
STM32_PB13: Q6.2 R13.1 U2.52
STM32_PB14: Q7.2 R14.1 U2.53
STM32_PC6: U2.63
STM32_PC7: U2.64
STM32_PC8: U2.65
STM32_PC9: U2.66
STM32_PC12: U2.80
STM32_PC13: U2.7
STM32_PC14: U2.8
STM32_PC15: U2.9
STM32_PD2: U2.83
STM32_PD4: U2.85
STM32_PD7: U2.88
STM32_PD10: Q8.2 R15.1 U2.57
STM32_PD11: Q9.2 R16.1 U2.58
STM32_PD12: Q10.2 R17.1 U2.59
STM32_PD13: U2.60
STM32_PD14: U2.61
STM32_PD15: U2.62
STM32_PE0: U2.97
STM32_PE1: U2.98
STM32_PE2: U2.1
STM32_PE3: U2.2
STM32_PE4: U2.3
STM32_PE5: U2.4
STM32_PE6: U2.5
STM32_PE11: U2.42
STM32_PE12: U2.43
STM32_PE13: U2.44
STM32_PE14: Q3.2 R10.1 U2.45
STM32_PE15: Q5.2 R12.1 U2.46
STM32_PH2: U2.73
STM32_SPI1_MOSI: U2.91
STM32_SPI2_MISO: Q13.2 R20.1 U2.84
STM32_SPI2_MOSI: Q12.2 R19.1 U2.54
STM32_SPI2_NSS: Q11.2 R18.1 U2.81
STM32_SPI2_SCK: Q14.2 R21.1 U2.82
STM32_U1_RX: U1.A49 U2.93
STM32_U1_TX: U1.A50 U2.92
STM32_U1RX: U2.68
STM32_U1TX: U2.69
STM32_U2_RX: U2.87
STM32_U2_TX: U2.86
STM32_U3_RX: U2.79
STM32_U3_TX: U2.78
STM32_U3RX: Q1.2 R8.1 U2.56
STM32_U3TX: Q2.2 R9.1 U2.55
TCK: JP1.9 U1.B10
TD1: JP1.5 U1.B12
TD2: JP1.13 U1.B9
TMS: JP1.7 U1.B11
TRST_N: JP1.3 U1.B13
U1_PLL_AVDD: C1.1 R1.1 U1.A38
U1_RSTN: U1.B8
U5_COMP: R81.2 R82.1 U5.5
U5_FB: R36.1 R37.2 U6.4
U5_SWC: R83.2 U5.1 U5.7 U5.8
U5_SWE: L1.1 U5.2
U5_TC: C7.1 D26.C U5.3
U5_VCC: C8.1 F1.P$2 R83.1 U5.6
U6_COMP: R38.2 U6.5
U6_LX: L2.1 R36.2 U6.7 U6.8 U6.PAD
U6_RC: C34.1 R38.1
U6_VIN: C15.1 F2.P$2 U6.2 U6.6
U7_FB: L3.2 U7.1
U7_SW: R84.1 R85.2 U7.3
U8_BOOT: C18.1 U8.1
U8_PH: C18.2 D27.C L4.1 U8.8
U8_VSNS: R106.1 R107.2 U8.4
U12_C1: C19.1 U12.10
U12_DRDY: U1.A57 U12.15
U12_SETP: C20.1 U12.8
U12SETC: C20.2 U12.12
U13_BYP: C25.1 U13.2
U13_INT1: U1.A54 U13.11
U13_INT2: U1.A55 U13.9
U13_SA0: U1.A56 U13.7
U14_CS: U1.B31 U14.5
U14_INT1: U14.7
U14_INT2: U14.6
U14_PLL: C26.1 C27.1 U14.14
USBDM: U2.70 X1.2
USBDP: U2.71 X1.3
USBID: X1.4
USD_SS: X2.2
VCC: C16.1 JP14.2 JP15.2 JP16.2 JP17.2 JP18.2 JP19.2 L2.2
VDD: U2.6
VUSB: X1.1
X0D00: R104.2 U1.A15
X0D01: R105.2 U1.A16
X0D02: Q18.2 R86.1 U1.A5
X0D03: Q19.2 R87.1 U1.A6
X0D04: Q20.2 R88.1 U1.A7
X0D05: Q21.2 R89.1 U1.A8
X0D06: Q22.2 R90.1 U1.A9
X0D07: Q23.2 R91.1 U1.A10
X0D08: Q24.2 R92.1 U1.A11
X0D09: U1.A12
X0D10: R102.2 U1.A13
X0D11: R103.2 U1.A14
X0D14: R56.2 U1.A58
X0D15: R55.2 U1.A59
X0D16: R54.2 U1.A60
X0D17: R53.2 U1.A61
X0D18: R52.2 U1.A63
X0D19: R51.2 U1.A64
X0D20: R50.2 U1.A65
X0D21: R49.2 U1.A66
X0D23: U1.A62
X0D25: U1.A67
X0D26: U1.B38
X0D27: U1.B39
X0D28: U1.B40
X0D29: U1.B41
X0D30: U1.B44
X0D31: U1.B45
X0D32: U1.B46
X0D33: U1.B47
X0D34: R101.2 U1.A4
X0D35: R100.2 U1.A3
X0D36: R48.2 U1.B48
X0D37: R47.2 U1.B49
X0D38: R46.2 U1.B50
X0D39: R45.2 U1.B51
X0D40: R44.2 U1.B52
X0D41: R43.2 U1.B53
X0D42: R42.2 U1.B54
X0D43: R41.2 U1.B55
X1D02: R64.2 U1.A41
X1D03: R63.2 U1.A42
X1D04: R62.2 U1.A43
X1D05: R61.2 U1.A44
X1D06: R60.2 U1.A45
X1D07: R59.2 U1.A46
X1D08: R58.2 U1.A47
X1D09: R57.2 U1.A48
X1D12: U1.A21
X1D13: U1.A23
X1D14: U1.A24
X1D15: U1.A25
X1D16: U1.A26
X1D17: U1.A27
X1D18: U1.A29
X1D19: U1.A30
X1D20: U1.A31
X1D21: U1.A32
X1D25: U1.A33
X1D26: U1.B16
X1D27: U1.B17
X1D28: U1.B18
X1D29: U1.B19
X1D30: U1.B20
X1D31: U1.B21
X1D32: U1.B22
X1D33: U1.B23
X1D34: U1.B24
Y1INVA-: C5.1 R3.1 U3.2 Y1.1
Y1RES: C6.1 R4.1 Y1.2